# Altium PCB PCB1.PcbDoc
Units mil, origin at the board's own origin, x right, y up, seen from the top; angles counter-clockwise.
Board outline 610.24 x 679.13 mil, 4 copper layers (Top Layer, Int1 (GND), Int2 (PWR), Bottom Layer), stack 53.912 mil thick; 21 components, 12 nets, 50 pads, 108 vias.
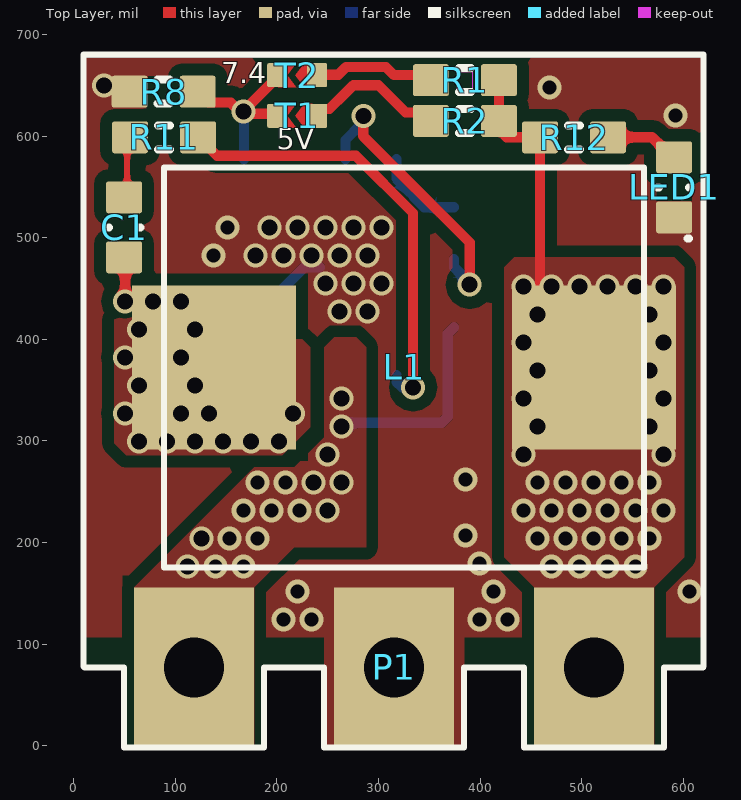
[diagram p0: Top Layer view]
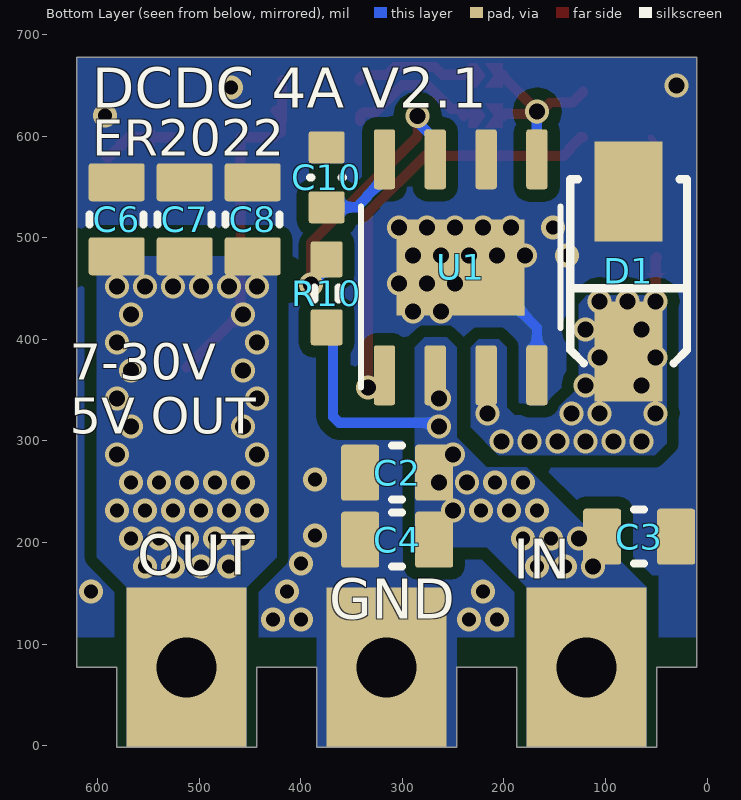
[diagram p1: Bottom Layer view, seen from below]
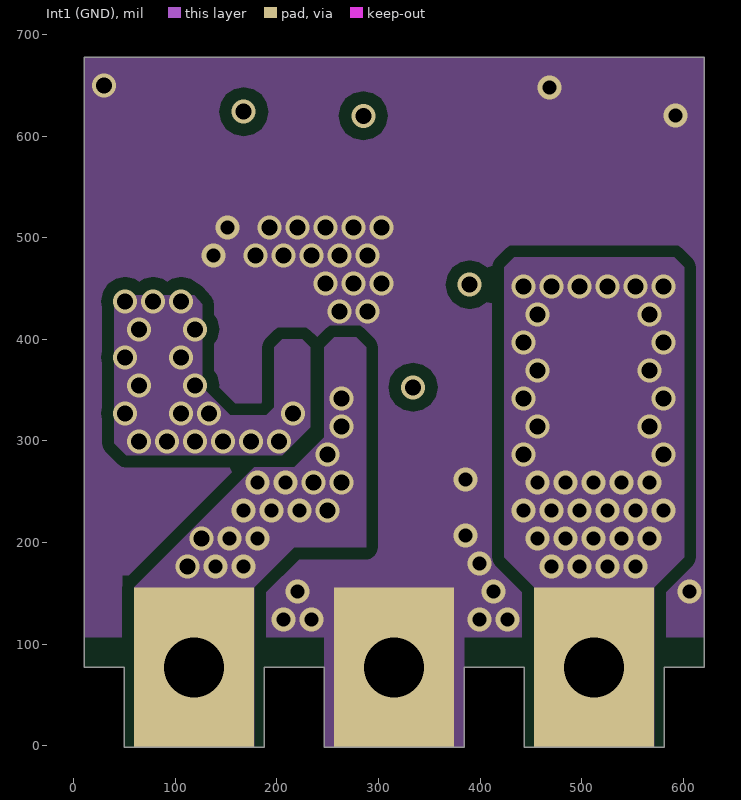
[diagram p2: Int1 (GND)]
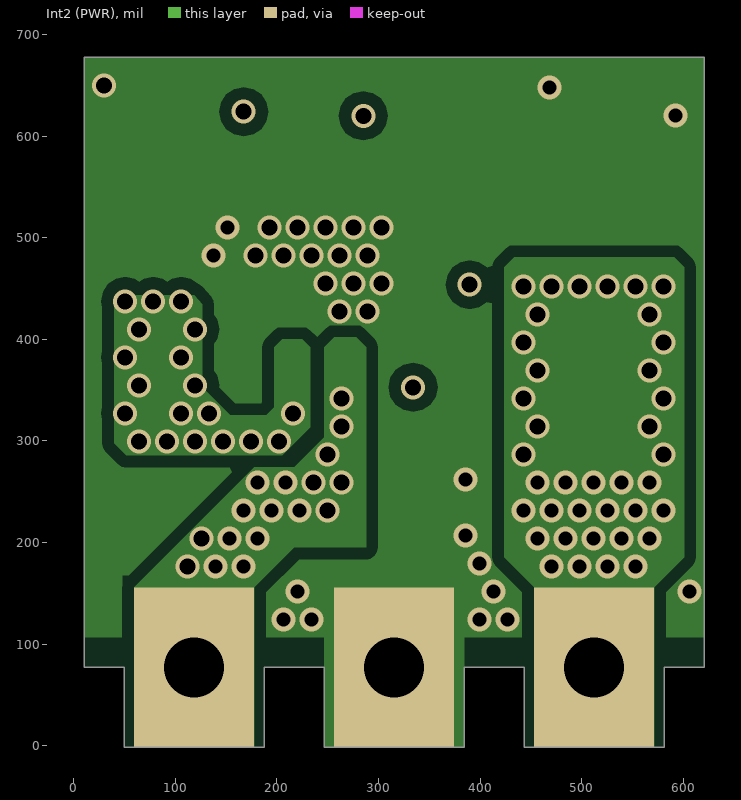
[diagram p3: Int2 (PWR)]
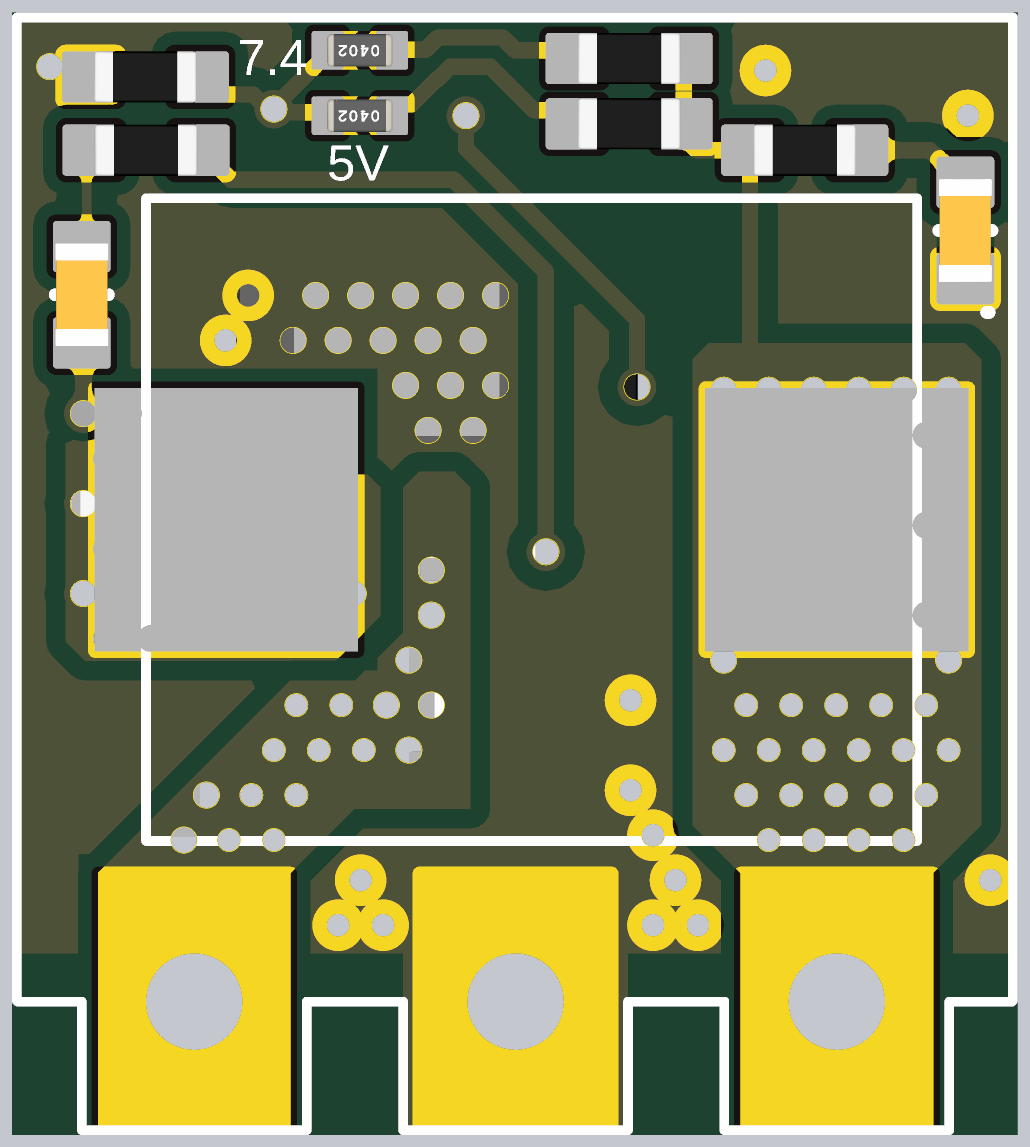
[diagram p4: 3D render of the assembled board from above, using the file's embedded part models]
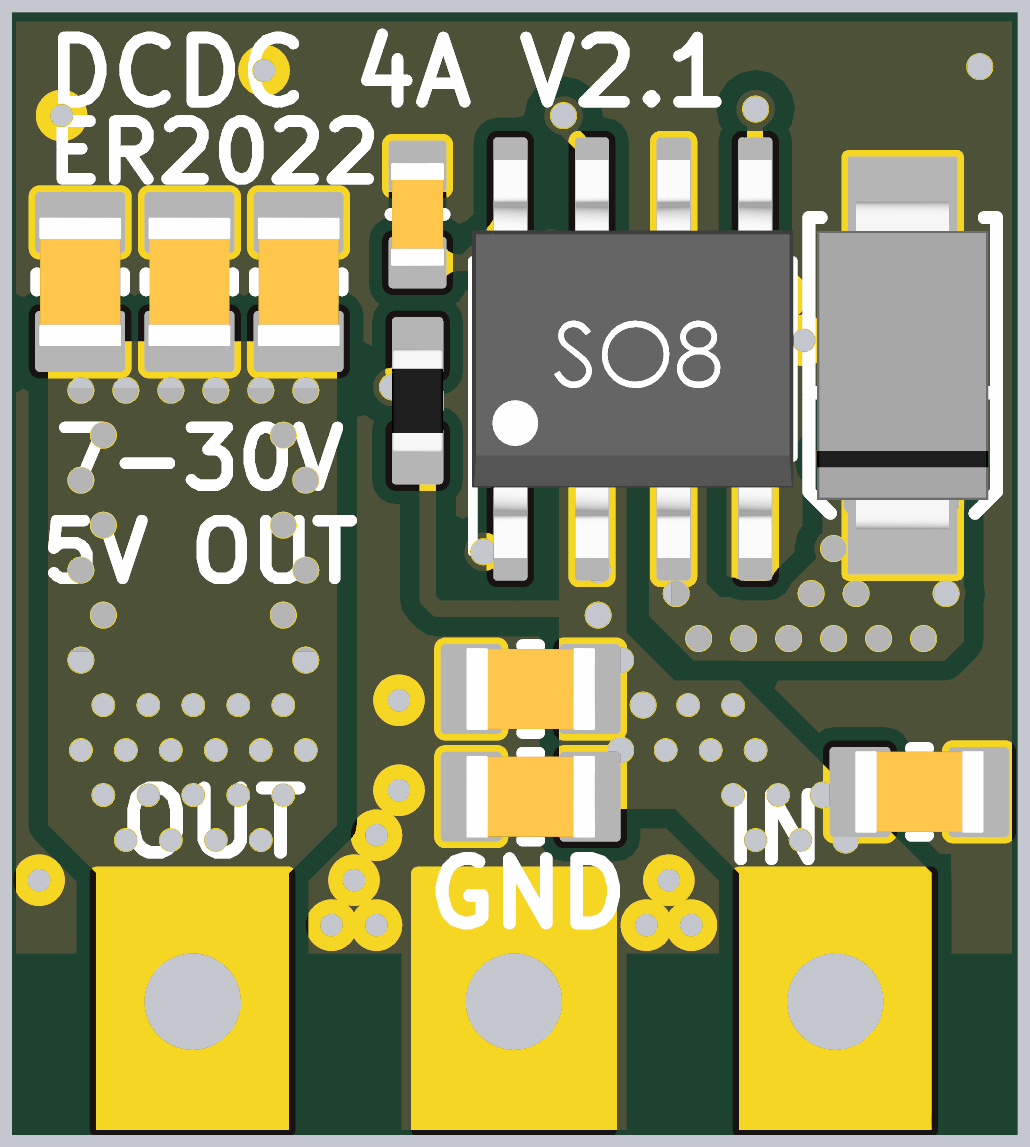
[diagram p5: 3D render of the assembled board from below, using the file's embedded part models]

## Layer stack, top to bottom
Top Solder: solder mask 1, SM-001, Dk 4
Top Layer: signal copper 1.378
Dielectric 1: prepreg 5.1, PP-017, Dk 4.3
Dielectric 2: prepreg 5.1, PP-017, Dk 4.3
Int1 (GND): signal copper 1.378
Dielectric 3: core 28, Core-039, Dk 4.8
Int2 (PWR): signal copper 1.378
Dielectric 4: prepreg 5.1, PP-017, Dk 4.3
Dielectric 5: prepreg 5.1, PP-017, Dk 4.3
Bottom Layer: signal copper 1.378
Bottom Solder: solder mask 1, SM-001, Dk 4

## Board outline
49.64,-1.54 187.44,-1.54 187.44,77.2 246.49,77.2 246.49,-1.54 384.29,-1.54 384.29,77.2 443.34,77.2 443.34,-1.54 581.14,-1.54 581.14,77.2 620.51,77.2 620.51,677.6 10.27,677.6 10.27,77.2 49.64,77.2

## Design rules (kind name [scope] priority, off if disabled: settings)
Clearance Clearance_GND [InNet('GND') OR InNet('VIN') OR InNet('NetC1_2') OR InNet('VOUT')] p1: gap=11.81 ignorepadtopadclearanceinfootprint=FALSE
Clearance [All] p2: gap=7.87 ignorepadtopadclearanceinfootprint=FALSE
Height [All] p1 off: minheight=0 maxheight=1000 prefheight=500
HoleSize [All] p1 off: absolutevalues=TRUE maxlimit=100 minlimit=1 maxpercent=80.000 minpercent=20.000
HoleToHoleClearance [All] p1 off: gap=10 allowstackedmicrovias=TRUE
LayerPairs [All] p1 off: enforce=TRUE
MinimumSolderMaskSliver [All] p1 off: minsoldermaskwidth=10
NetAntennae [All] p1 off: netantennaetolerance=0
PasteMaskExpansion [All] p1 off: expansion=0
PolygonConnect PolygonConnect_1 [(InNet('NetC1_2') OR InNet('GND') OR InNet('VOUT') OR InNet('VIN')) OR InNet('SW')] p1: connectstyle=Direct reliefconductorwidth=19.68 reliefentries=4 polygonreliefangle="90 Angle" airgapwidth=10
PolygonConnect [All] p2: connectstyle=Relief reliefconductorwidth=10 reliefentries=4 polygonreliefangle="90 Angle" airgapwidth=10
RoomDefinition Sheet1 [InComponentClass('Sheet1')] p1 off: confinementstyle=ConfineIn formatcopy=TRUE lockcomponents=FALSE outline 4594.21,-495.04 8609.21,-495.04 8609.21,44.96 4594.21,44.96
RoutingVias [All] p1: holewidth=23.62 width=23.62 viastyle="Through Hole" minholewidth=11.81 minwidth=23.62 maxholewidth=15.75 maxwidth=59.06
SilkToSilkClearance [All] p1 off: silktosilkclearance=10
SilkToSolderMaskClearance [IsPad] p1 off: minsilkscreentomaskgap=10 clearancetoexposedcopper=TRUE
SolderMaskExpansion [All] p1 off: expansion=4 istentingtop=FALSE
Width [All] p1: maxlimit=39.37 minlimit=5 preferedwidth=5.91
21 further rules are at their usual default settings.

## Components (designator, comment, footprint, x,y, rotation, side; value= is the part's Value field where it differs from the comment)
C1 "Capacitor-0603-0.1uF-50V-X7R" CAPACITOR-0603 49.64,510.27 r270 top value=0.1uF
C2 "Capacitor-0805-10uF-35V-X5R" CAPACITOR-0805 305.12,268.7 r180 bottom value=10uF
C3 "Capacitor-0805-10uF-35V-X5R" CAPACITOR-0805 66.93,205.71 r0 bottom value=10uF
C4 "Capacitor-0805-10uF-35V-X5R" CAPACITOR-0805 305.12,202.76 r180 bottom value=10uF
C6 "Capacitor-0805-22uF-16V-X5R" CAPACITOR-0805 581.14,518.15 r270 bottom value=22uF
C7 "Capacitor-0805-22uF-16V-X5R" CAPACITOR-0805 514.21,518.15 r270 bottom value=22uF
C8 "Capacitor-0805-22uF-16V-X5R" CAPACITOR-0805 447.28,518.15 r270 bottom value=22uF
C10 "Capacitor-0603-0.1uF-50V-X7R" CAPACITOR-0603 374.45,559.49 r90 bottom value=0.1uF
D1 "CDBA540-HF" SMA/DO-214AC 77.2,466.97 r270 bottom
L1 "104CDMCCDS-220MC" "Inductor_22UH 5A" 325.23,372.48 r0 top locked value=22uH
LED1 "B1911USD-20D000114U1930" LED-0603-2PIN 590.98,549.64 r90 top
P1 "3pos-TH-5.0mm" "Side Connector 3pins" 118.54,77.2 r0 top
R1 "SMT resistor" Resistor-0603#1 385,655 r0 top value=31.6K
R2 "SMT resistor" Resistor-0603#2 385,615 r0 top value=21k
R8 "SMT resistor" Resistor-0603#2 88.58,643.7 r0 top value=3.9k
R10 "SMT resistor" Resistor-0603#2 374.45,445.31 r90 bottom value=510k
R11 "SMT resistor" Resistor-0603#2 89.01,598.86 r180 top value=22R
R12 "SMT resistor" Resistor-0603#2 492.56,598.86 r180 top value=1k
T1 "NetTie_0402" NetTie-0402 220,620 r180 top
T2 "NetTie_0402" NetTie-0402 220,660 r180 top
U1 "NR111E" SOIC-8-EXPOSED-PAD 242.56,470.9 r180 bottom

## Footprints (in the part's own frame and the unit in brackets; to place one, negate y for a bottom-side part, rotate by r counter-clockwise, add the part's x,y. Pads: shape width x height; smd on the part's side, far side on the other; paste and mask are expansions set on the pad)
CAPACITOR-0603 [mm] "Metric 1608, EIA 0603. Per Yageo Product Specification V2.2"
  rrect15% 0.8x0.9 smd: 1(-0.75,0) 2(0.75,0)
  Top Layer pour cut-out: -0.35,0.45 0.35,0.45 0.35,-0.45 -0.35,-0.45
  silkscreen extent 0,-0.41 0,0.41, body extent -0.93,-0.41 0.93,0.41, height 0.81
CAPACITOR-0805 [mm] "Metric 2012, EIA 0805, Per Yageo Product Specification V2.2"
  rrect15% 0.95x1.4 smd: 1(-0.925,0) 2(0.925,0)
  silkscreen extent -0.13,-0.67 0.13,0.67, body extent -1.09,-0.64 1.09,0.64, height 1.26
"Inductor_22UH 5A" [mm]
  rect 4.1x4.1 smd: 1(-4.75,0) 2(4.75,0)
  silkscreen extent -6,-5 6,5, body extent -5,-5 5,5, height 3.8
LED-0603-2PIN [mm] "Metric 1608, EIA 0603. Per Yageo Product Specification V2.2"
  rrect15% 0.8x0.9 smd: 1(-0.75,0) 2(0.75,0)
  Top Layer pour cut-out: -0.35,0.45 0.35,0.45 0.35,-0.45 -0.35,-0.45
  silkscreen extent -1.28,-0.41 0,0.41, body extent -0.93,-0.41 0.93,0.41, height 0.81
NetTie-0402 [mm] "Metric 1005, EIA 0402 Drawn per Yageo \"Chip resistors Mounting\" rev 10"
  rrect15% 0.5x0.6 smd: 1(-0.5,0) 2(0.5,0)
  Top Layer region: 0.475,0.3 0.025,0.3 0.25,0 0.025,-0.3 0.375,-0.3 0.475,-0.3
  Top Layer region: -0.375,0.3 -0.175,0.3 0.05,0 -0.175,-0.3 -0.375,-0.3
  body extent -0.51,-0.25 0.51,0.25, height 0.51
Resistor-0603#1 [mm] "Metric 1608, EIA 0603 Drawn per Yageo \"Chip resistors Mounting\" rev 10"
  rrect15% 0.9x0.8 smd: 1(-0.85,0) 2(0.85,0)
  Top Layer pour cut-out: -0.2,0.2 0.2,0.2 0.2,-0.2 -0.2,-0.2
  Top Layer keep-out region: -0.2,-0.2 0.2,-0.2 0.2,0.2 -0.2,0.2
  silkscreen extent -0.15,-0.3 0.15,0.3, body extent -0.8,-0.4 0.8,0.4, height 0.55
Resistor-0603#2 [mm] "Metric 1608, EIA 0603 Drawn per Yageo \"Chip resistors Mounting\" rev 10"
  rrect15% 0.9x0.8 smd: 1(-0.85,0) 2(0.85,0)
  Top Layer pour cut-out: -0.4,0.4 0.4,0.4 0.4,-0.4 -0.4,-0.4
  silkscreen extent -0.15,-0.3 0.15,0.3, body extent -0.8,-0.4 0.8,0.4, height 0.55
"Side Connector 3pins" [mm]
  rect 3x4 hole 1.5: 1(0,0) 2(5,0) 3(10,0)
SMA/DO-214AC [mm] "SMA, DO-214AC. From Diode DS19005 rev 16-2"
  rect 2.5x1.7 smd: 1(-2,0) 2(2,0)
  silkscreen extent -2.3,-1.46 2.3,1.46, body extent -2.55,-1.33 2.55,1.33, height 2.08
SOIC-8-EXPOSED-PAD [mm] "8-Lead Plastic Small Outline, 0.15in pitch,  LTC DWG # 05-08-1610 Rev G"
  rrect25% 0.533x1.5 smd: 1(-1.905,-2.7) 2(-0.635,-2.7) 3(0.635,-2.7) 4(1.905,-2.7) 5(1.905,2.7) 6(0.635,2.7) 7(-0.635,2.7) 8(-1.905,2.7)
  rect 3.2x2.4 smd: 9(0,0)
  silkscreen extent -2.49,-3 2.49,1.52, body extent -2.5,-3.1 2.5,3.1, height 1.75

## Part data
C1 C10: Package / Case="Metric 1608, EIA 0603", Supplier Part Number 1=1276-1935-2-ND, Volt=50V, Mounted=Yes, Precision=X7R-10%, Supplier 1=Digi-Key, Supplier 2=Digi-Key, Supplier 3=Digi-Key, Supplier 4=Digi-Key, Supplier Part Number 2=1276-1934-2-ND
C2 C3 C4: Package / Case="Metric 2012 , EIA 0805", Supplier Part Number 1=490-10515-1-ND, Volt=35V, Mounted=Yes, Precision=X5R-10%, Supplier 1=Digi-Key, Supplier 2=Digi-Key, Supplier 3=Digi-Key, Supplier 4=Digi-Key
C6 C7 C8: Package / Case="Metric 2012 , EIA 0805", Supplier Part Number 1=1276-6780-1-ND, Volt=16V, Mounted=Yes, Precision=X5R-10%, Supplier 1=Digi-Key, Supplier 2=Digi-Key, Supplier 3=Digi-Key, Supplier 4=Digi-Key
D1: "DIODE SCHOTTKY 40V 5A SMA", Package / Case=SMA, Supplier Part Number 1=641-1707-1-ND, Volt=40V, Mounted=Yes, Supplier 1=Digi-Key
L1: "FIXED IND 22UH 5A 66 MOHM SMD", Current=5A, Package / Case=SMD, Supplier Part Number 1=308-2498-1-ND, Mounted=Yes, Precision=20%, Supplier 1=Digi-Key
LED1: "LED RED CLEAR 1608 SMD", Package / Case="0603 (1608 Metric)", Supplier Part Number 1=3147-B1911USD-20D000114U1930CT-ND, Mounted=Yes, Supplier 1=Digi-Key
P1: "3pos-TH-5.0mm Screw Terminal", Package / Case=TH, Supplier Part Number 1=277-1667-ND, Volt=N/A, Mounted=Yes, Supplier 1=Digi-Key
R1 R2: library part Resistor0603-21k, "Resistor", Package / Case="Metric 1608, EIA 0603", Supplier Part Number 1=311-21.0KHRCT-ND, Mounted=Yes, Precision=1%, Supplier 1=Digi-Key, Supplier 2=Digi-Key, Supplier 3=Digi-Key, Supplier 4=Digi-Key, Watt=0.1W
R8: library part Resistor0603-3.9k, "Resistor", Package / Case="Metric 1608, EIA 0603", Supplier Part Number 1=311-3.90KHRCT-ND, Mounted=Yes, Precision=1%, Supplier 1=Digi-Key, Supplier 2=Digi-Key, Supplier 3=Digi-Key, Supplier 4=Digi-Key, Watt=0.1W
R10: library part Resistor0603-510k, "Resistor", Package / Case="Metric 1608, EIA 0603", Supplier Part Number 1=P510KHCT-ND, Mounted=Yes, Precision=1%, Supplier 1=Digi-Key, Supplier 2=Digi-Key, Supplier 3=Digi-Key, Supplier 4=Digi-Key, Watt=0.1W
R11: library part Resistor0603-22R, "Resistor", Package / Case="Metric 1608, EIA 0603", Supplier Part Number 1=RMCF0603FT22R0CT-ND, Mounted=Yes, Precision=1%, Supplier 1=Digi-Key, Supplier 2=Digi-Key, Supplier 3=Digi-Key, Supplier 4=Digi-Key, Watt=0.1W
R12: library part Resistor0603-1k, "Resistor", Package / Case="Metric 1608, EIA 0603", Supplier Part Number 1=RMCF0603FT1K00TR-ND, Mounted=Yes, Precision=1%, Supplier 1=Digi-Key, Supplier 2=Digi-Key, Supplier 3=Digi-Key, Supplier 4=Digi-Key, Supplier Part Number 2=311-1.00KHRTR-ND, Supplier Part Number 3=AG1307TR-ND, Watt=0.1W
U1: "IC REG BUCK ADJUSTABLE 4A 8SOIC", Package / Case=8-SOIC-EP, Supplier Part Number 1=NR111ECT-ND, Grade=None, helpURL=https://www.digikey.ca/en/products/detail/sanken/NR111E/4289131, Mounted=Yes, Supplier 1=Digi-Key

## Via types
v1: diameter 23.62, hole 15.75, Top Layer to Bottom Layer, tented both sides, 65 vias
v2: diameter 23.62, hole 13.78, Top Layer to Bottom Layer, tented both sides, 29 vias
v3: diameter 23.62, hole 13.78, Top Layer to Bottom Layer, 14 vias

## Nets (pads, with @x,y where several pads share a name; then routed paths per layer and width w, separated by ;. In a path a pad name is that pad's centre, name@x,y a point inside that pad or via, vN(x,y) a via of type N, cw(c..) or ccw(c..) an arc to the next point about the centre after c; other vN are vias at no path point)
FB: R8.2 T1.2 T2.2 U1.5 | length 189
  Top Layer w10: R8.2 132.8,632.95 154.7,632.95 163.64,624.02 v1(167.32,624.02) ; T1.2 198.31,622.01 169.33,622.01 v1(167.32,624.02) ; T2.2 200.32,658.03 167.32,625.04 v1(167.32,624.02)
  Bottom Layer w10: U1.5 167.65,577.3 167.65,628.28 v1@167.75,628.38
GND: C2.1 C3.1 C4.1 C6.1 C7.1 C8.1 C10.2 D1.1 LED1.1 P1.2 R8.1 U1.4 U1.6 U1.9 | length 146.6
  Bottom Layer w10: U1.4 167.55,411.65 226.81,470.9 U1.9
  other v1: 261.81,427.17 289.37,427.17 248.03,454.72 275.59,454.72 303.15,454.72 179.13,482.28 206.69,482.28 234.25,482.28 261.81,482.28 289.37,482.28 192.91,509.84 220.47,509.84 248.03,509.84 275.59,509.84 303.15,509.84 30,650
  other v3: 206.69,124.02 234.25,124.02 399.61,124.02 427.17,124.02 220.47,151.57 413.39,151.57 606.3,151.57 399.61,179.13 385.83,206.69 385.83,261.81 137.79,482.28 151.57,509.84 592.52,620.08 468.5,647.64
NetC1_1: C1.1 R11.2 | length 61.5
  Top Layer w5.91: C1.1 52.6,542.75 52.6,595.9 R11.2
NetC1_2: C1.2 D1.2 L1.1 U1.3 | length 43.7
  Top Layer w10: C1.2 50.63,479.76 v1(50.63,437.44)
  other v1: 64.41,299.64 91.97,299.64 119.53,299.64 147.09,299.64 174.64,299.64 202.2,299.64 50.63,327.2 105.75,327.2 133.31,327.2 215.98,327.2 64.41,354.76 119.53,354.76 50.63,382.32 105.75,382.32 64.41,409.88 119.53,409.88 78.19,437.44 105.75,437.44
NetC10_1: C10.1 U1.8 | length 88.1
  Bottom Layer w10: U1.8 317.55,558.17 335.08,540.65 335.08,539.8 344.92,529.96 C10.1
NetLED1_2: LED1.2 R12.1 | length 73.1
  Top Layer w10: R12.1 569.33,598.86 589.01,579.17 LED1.2
NetR1_1: R1.1 T2.1 | length 112
  Top Layer w10: T2.1 240.05,660.36 260.36,660.36 267.87,667.87 307.4,667.87 315.28,660 338.82,660 341.87,656.94 R1.1@341.87,654.87
NetR2_1: R2.1 T1.1 | length 133.2
  Top Layer w10: T1.1 239.68,621.97 244.53,626.81 251.81,626.81 267.13,642.13 267.4,642.13 275.28,650 300,650 326.62,623.38 338.82,623.38 341.54,620.66 R2.1@341.54,615
NetR10_2: R10.2 U1.7 | length 291
  Top Layer w10: v1(285,620) 285,600 389.78,495.22 v1(389.78,453.76)
  Bottom Layer w10: U1.7 267.55,596.23 282.39,611.07 282.39,617.39 v1(285,620) ; R10.2 374.45,470.9 389.78,455.57 v1(389.78,453.76)
NetR11_1: R11.1 U1.1 | length 439.8
  Top Layer w10: R11.1 124.45,598.86 135.2,588.11 135.2,586.57 141.05,580.71 277.56,580.71 333.99,524.28 v1(333.99,352.79)
  Bottom Layer w10: U1.1 317.55,358.29 323.05,352.79 v1(333.99,352.79)
VIN: C2.2 C3.2 C4.2 P1.1 R10.1 U1.2 | length 199.1
  Bottom Layer w10: v1(263.78,313.98) 267.47,313.98 271.4,317.91 362.25,317.91 368.11,323.77 368.11,405.51 R10.1
  other v1: 112.2,176.18 125.98,203.74 250,231.3 236.22,258.86 263.78,258.86 250,286.42 263.78,341.54
  other v2: 139.76,176.18 167.32,176.18 153.54,203.74 181.1,203.74 167.32,231.3 194.88,231.3 222.44,231.3 181.1,258.86 208.66,258.86
VOUT: C6.2 C7.2 C8.2 L1.2 P1.3 R1.2 R2.2 R12.2 | length 349
  Top Layer w9.84: R2.2@418.9,619.37 422.09,622.57 R2.2@424.8,625.27 ; R12.2 459.09,425.63 L1.2
  Top Layer w10: R2.2 R1.2 ; R2.2@419.66,603.47 R2.2@419.66,615 ; R2.2@420.64,604.46 426.25,598.86 R12.2
  other v1: 442.91,286.42 580.71,286.42 456.69,313.98 566.93,313.98 442.91,341.54 580.71,341.54 456.69,369.09 566.93,369.09 442.91,396.65 580.71,396.65 456.69,424.21 566.93,424.21 442.91,451.77 470.47,451.77 498.03,451.77 525.59,451.77 553.15,451.77 580.71,451.77
  other v2: 470.47,176.18 498.03,176.18 525.59,176.18 553.15,176.18 456.69,203.74 484.25,203.74 511.81,203.74 539.37,203.74 566.93,203.74 442.91,231.3 470.47,231.3 498.03,231.3 525.59,231.3 553.15,231.3 580.71,231.3 456.69,258.86 484.25,258.86 511.81,258.86 539.37,258.86 566.93,258.86

## Polygon pours and split planes (outlines as drawn)
GND on Bottom Layer "Bottom Layer-GND" (solid, remove dead copper, pour order 18): 10.27,677.6 620.51,677.6 620.51,106.73 384.29,106.73 384.29,-1.54 246.49,-1.54 246.49,106.73 10.27,106.73
NetC1_2 on Bottom Layer "Bottom Layer-NetC1_2" (solid, pour order 10): 197.28,333.11 189.41,325.23 153.97,325.23 126.42,352.79 126.42,434.34 118.54,443.34 47.68,443.34 39.8,435.47 39.8,297.67 51.61,285.86 205.16,285.86 232.72,313.42 232.72,392.16 224.84,400.04 205.16,400.04 197.28,392.16
VIN on Bottom Layer "Bottom Layer-VIN" (solid, pour order 5): 59.49,-1.54 59.49,155.94 177.6,274.05 216.97,274.05 246.49,303.58 246.49,392.16 256.34,402 277.99,402 287.83,392.16 287.83,195.31 216.97,195.31 177.6,155.94 177.6,-1.54
VOUT on Bottom Layer "Bottom Layer-VOUT" (solid, pour order 2): 512.24,-1.54 571.3,-1.54 571.3,155.94 600.83,185.47 600.83,470.9 590,481.73 434.49,481.73 423.66,470.9 423.66,185.47 453.19,155.94 453.19,-1.54
GND on Top Layer "Top Layer-GND" (solid, remove dead copper, pour order 15): 10.27,677.6 620.51,677.6 620.51,106.73 384.29,106.73 384.29,-1.54 246.49,-1.54 246.49,106.73 10.27,106.73
NetC1_2 on Top Layer "Top Layer-NetC1_2" (solid, pour order 11): 197.28,333.11 189.41,325.23 153.97,325.23 126.42,352.79 126.42,434.34 118.54,443.34 47.68,443.34 39.8,435.47 39.8,297.67 51.61,285.86 205.16,285.86 232.72,313.42 232.72,392.16 224.84,400.04 205.16,400.04 197.28,392.16
VIN on Top Layer "Top Layer-VIN" (solid, pour order 7): 59.49,-1.54 59.49,155.94 177.6,274.05 216.97,274.05 246.49,303.58 246.49,392.16 256.34,402 277.99,402 287.83,392.16 287.83,195.31 216.97,195.31 177.6,155.94 177.6,-1.54
VOUT on Top Layer "Top Layer-VOUT" (solid, pour order 1): 512.24,-1.54 571.3,-1.54 571.3,155.94 600.83,185.47 600.83,470.9 590.98,480.75 433.5,480.75 423.66,470.9 423.66,185.47 453.19,155.94 453.19,-1.54
GND on Int1 (GND) "Int1 (GND)-GND" (solid, remove dead copper, pour order 16): 10.27,677.6 620.51,677.6 620.51,106.73 384.29,106.73 384.29,-1.54 246.49,-1.54 246.49,106.73 10.27,106.73
NetC1_2 on Int1 (GND) "Int1 (GND)-NetC1_2" (solid, pour order 12): 197.28,333.11 189.41,325.23 153.97,325.23 126.42,352.79 126.42,434.34 118.54,443.34 47.68,443.34 39.8,435.47 39.8,297.67 51.61,285.86 205.16,285.86 232.72,313.42 232.72,392.16 224.84,400.04 205.16,400.04 197.28,392.16
VIN on Int1 (GND) "Int1 (GND)-VIN" (solid, pour order 8): 59.49,-1.54 59.49,155.94 177.6,274.05 216.97,274.05 246.49,303.58 246.49,392.16 256.34,402 277.99,402 287.83,392.16 287.83,195.31 216.97,195.31 177.6,155.94 177.6,-1.54
VOUT on Int1 (GND) "Int1 (GND)-VOUT" (solid, pour order 3): 512.24,-1.54 571.3,-1.54 571.3,155.94 600.83,185.47 600.83,470.9 590.98,480.75 433.5,480.75 423.66,470.9 423.66,185.47 453.19,155.94 453.19,-1.54
GND on Int2 (PWR) "Int2 (PWR)-GND" (solid, remove dead copper, pour order 17): 10.27,677.6 620.51,677.6 620.51,106.73 384.29,106.73 384.29,-1.54 246.49,-1.54 246.49,106.73 10.27,106.73
NetC1_2 on Int2 (PWR) "Int2 (PWR)-NetC1_2" (solid, pour order 13): 197.28,333.11 189.41,325.23 153.97,325.23 126.42,352.79 126.42,434.34 118.54,443.34 47.68,443.34 39.8,435.47 39.8,297.67 51.61,285.86 205.16,285.86 232.72,313.42 232.72,392.16 224.84,400.04 205.16,400.04 197.28,392.16
VIN on Int2 (PWR) "Int2 (PWR)-VIN" (solid, pour order 9): 59.49,-1.54 59.49,155.94 177.6,274.05 216.97,274.05 246.49,303.58 246.49,392.16 256.34,402 277.99,402 287.83,392.16 287.83,195.31 216.97,195.31 177.6,155.94 177.6,-1.54
VOUT on Int2 (PWR) "Int2 (PWR)-VOUT" (solid, pour order 4): 512.24,-1.54 571.3,-1.54 571.3,155.94 600.83,185.47 600.83,470.9 590.98,480.75 433.5,480.75 423.66,470.9 423.66,185.47 453.19,155.94 453.19,-1.54

## Silkscreen, mask and mechanical layers (free items; w line width, h text height)
Top Overlay:
  lines w5.91: 9.84,77.76 9.84,680.12 620.08,680.12 620.08,77.76 619.52,77.2 581.14,77.2 581.14,-1.54 443.34,-1.54 443.34,77.2 384.29,77.2 384.29,-1.54 246.49,-1.54 246.49,77.2 187.44,77.2 187.44,-1.54 49.64,-1.54 49.64,77.2 10.4,77.2 9.84,77.76
  text "7.4" at 145,645 h35
  text "5V" at 200,580.39 h35
Bottom Overlay:
  text "DCDC 4A V2.1" at 605.12,628.15 h39.37
  text "ER2022" at 605.12,580.91 h35.43
  text "7-30V / 5V OUT" at 627.26,307.09 h35.43
  text "OUT" at 561.02,168.31 h39.37
  text "IN" at 190.94,164.37 h39.37
  text "GND" at 372.05,125 h39.37
Board:
  lines w5.91: 9.84,77.76 9.84,680.12 620.08,680.12 620.08,77.76 ; 10.4,77.2 49.64,77.2 49.64,-1.54 187.44,-1.54 187.44,77.2 246.49,77.2 246.49,-1.54 384.29,-1.54 384.29,77.2 443.34,77.2 443.34,-1.54 581.14,-1.54 581.14,77.2 619.52,77.2